# Altium PCB PCB2.PcbDoc
Units mil, origin at the board's own origin, x right, y up, seen from the top; angles counter-clockwise.
Board outline 5473 x 2834 mil, 2 copper layers (Top Layer, Bottom Layer); 32 components, 38 nets, 185 pads, 40 vias.
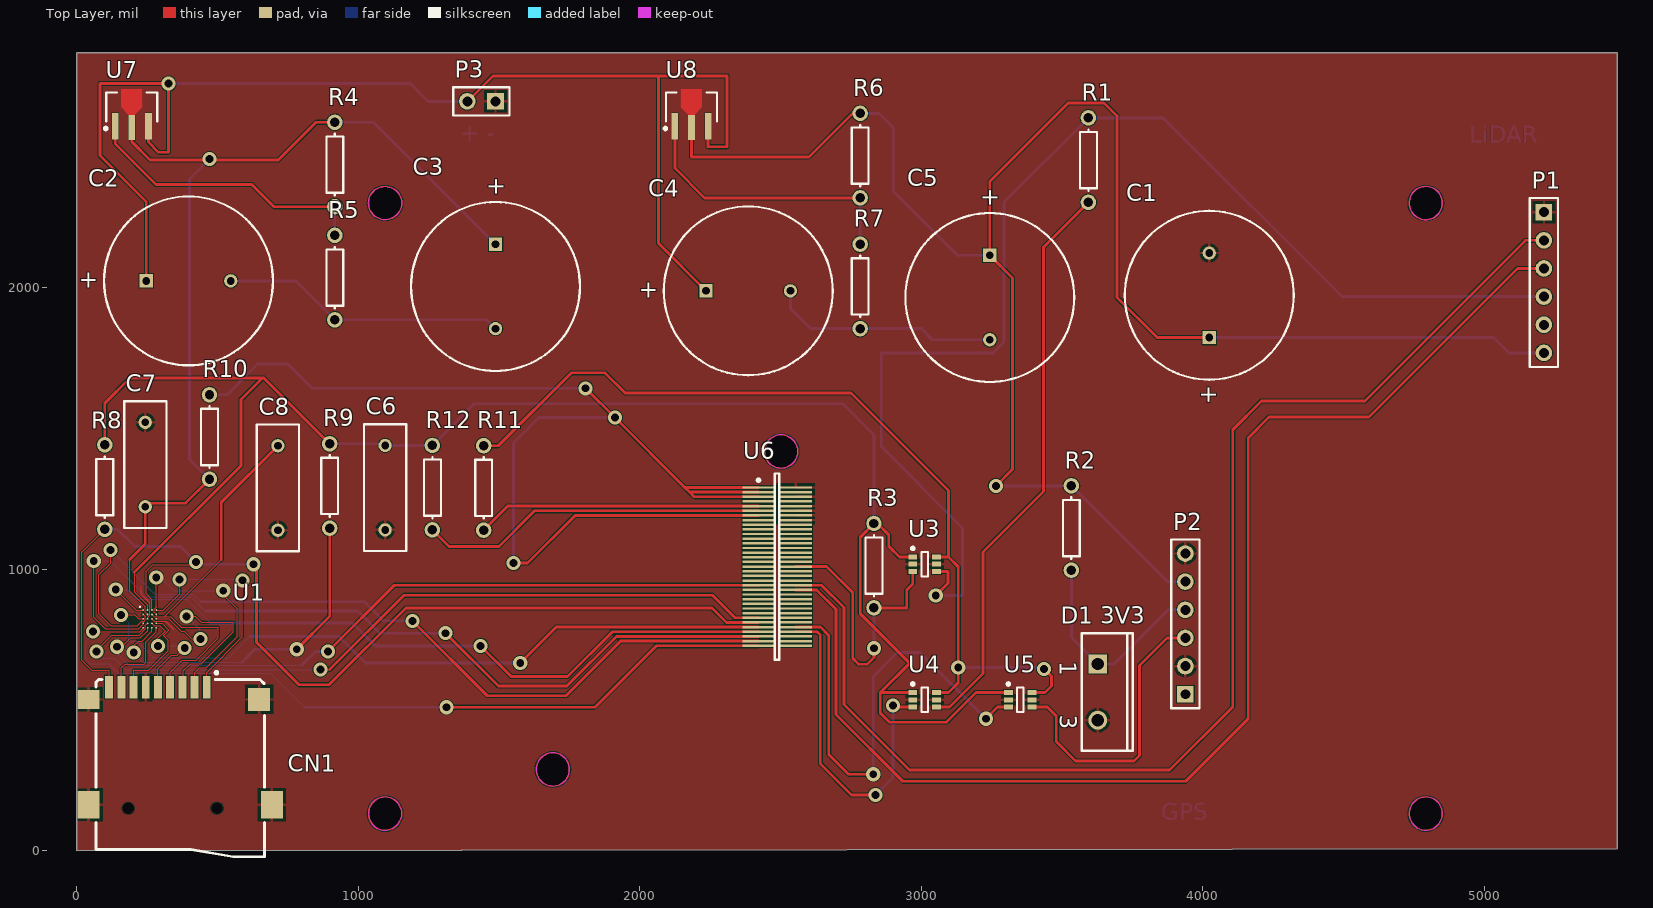
[diagram p0: Top Layer view]
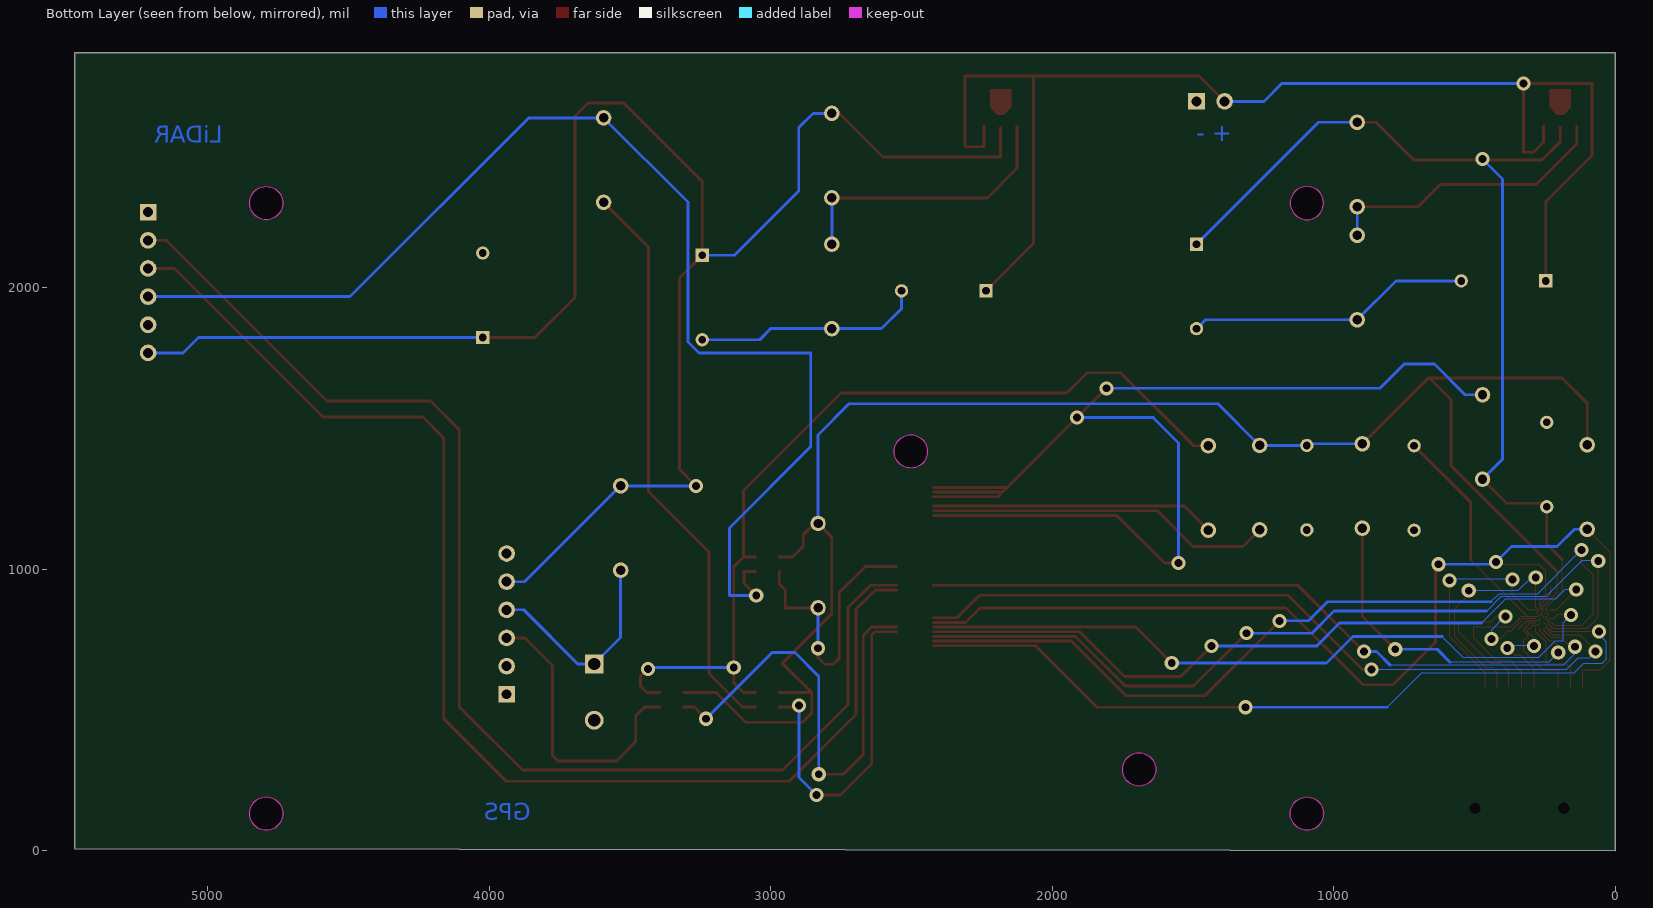
[diagram p1: Bottom Layer view, seen from below]

## Layer stack, top to bottom
Top Solder: solder mask 0.4, Solder Resist, Dk 3.5
Top Layer: signal copper 1.4
Dielectric 1: dielectric 12.6, FR-4, Dk 4.8
Bottom Layer: signal copper 1.4
Bottom Solder: solder mask 0.4, Solder Resist, Dk 3.5

## Board outline
0,0 0,2820 0,2834 14,2834 5473,2834 5473,7 5473,6
cut-out: 1632.82,288.16 ccw(c1691.87,288.16) 1691.87,229.1 ccw(c1691.87,288.16) 1750.93,288.16 ccw(c1691.87,288.16) 1691.87,347.21 ccw(c1691.87,288.16)
cut-out: 2443.84,1417.68 ccw(c2502.9,1417.68) 2502.9,1358.63 ccw(c2502.9,1417.68) 2561.95,1417.68 ccw(c2502.9,1417.68) 2502.9,1476.74 ccw(c2502.9,1417.68)
cut-out: 1095.87,2240.94 cw(c1095.87,2300) 1036.82,2300 cw(c1095.87,2300) 1095.87,2359.06 cw(c1095.87,2300) 1154.93,2300 cw(c1095.87,2300)
cut-out: 1036.82,131.16 ccw(c1095.87,131.16) 1095.87,72.1 ccw(c1095.87,131.16) 1154.93,131.16 ccw(c1095.87,131.16) 1095.87,190.21 ccw(c1095.87,131.16)
cut-out: 4733.82,131.16 ccw(c4792.87,131.16) 4792.87,72.1 ccw(c4792.87,131.16) 4851.93,131.16 ccw(c4792.87,131.16) 4792.87,190.21 ccw(c4792.87,131.16)
cut-out: 4733.82,2300 ccw(c4792.87,2300) 4792.87,2240.94 ccw(c4792.87,2300) 4851.93,2300 ccw(c4792.87,2300) 4792.87,2359.06 ccw(c4792.87,2300)

## Design rules (kind name [scope] priority, off if disabled: settings)
Clearance "Clearance_Pwr Reg" [InComponent('U7','U8')] p1: gap=0
Clearance Clearance_BGA [All] p2: gap=3
Clearance Clearance_5mil [All] p3: gap=5
Clearance [All] p4: gap=10
FanoutControl Fanout_BGA [IsBGA] p1: bgadir=Out bgaviamode=Centered fanoutstyle=BGA fanoutdirection=Alternating viagrid=1 // Fanout_BGA (Default Rule)
PolygonConnect [All] p1: connectstyle=Relief reliefconductorwidth=10 reliefentries=4 polygonreliefangle="90 Angle" airgapwidth=10
RoomDefinition BGA [InComponentClass('Room Definition 1')] p1: confinementstyle=ConfineIn formatcopy=TRUE lockcomponents=FALSE outline 207.52,762.64 207.52,883.03 312.17,883.03 312.17,762.64
RoutingVias RoutingVias_BGA [WithinRoom('BGA')] p1: holewidth=10 width=20 viastyle="Through Hole" minholewidth=10 minwidth=20 maxholewidth=10 maxwidth=20
RoutingVias [All] p2: holewidth=28 width=50 viastyle="Through Hole" minholewidth=28 minwidth=50 maxholewidth=28 maxwidth=50
SolderMaskExpansion [All] p1: expansion=4
Width Width_BGA [WithinRoom('BGA')] p1: maxlimit=3 minlimit=3 preferedwidth=3
Width [All] p2: maxlimit=10 minlimit=3 preferedwidth=3
29 further rules are at their usual default settings.

## Classes and differential pairs
component class "Room Definition 1": U1
component class PCB_01: C1 C2 C3 C4 C5 C6 C8 CN1 "D1 3V3" P1 P2 P3 R1 R2 R3 R4 R5 R6 R7 R8 R9 R10 R11 R12 U1 U3 U4 U5

## Components (designator, comment, footprint, x,y, rotation, side; value= is the part's Value field where it differs from the comment)
C1 "Cap Pol1" RB7.6-15 4023.62,1972.44 r270 top
C2 "Cap Pol1" RB7.6-15 397.64,2023.62 r180 top
C3 "Cap Pol1" RB7.6-15 1488.19,2003.94 r90 top
C4 "Cap Pol1" RB7.6-15 2385.83,1988.19 r180 top
C5 "Cap Pol1" RB7.6-15 3244.09,1964.57 r90 top
C6 "Cap" RAD-0.3 1096,1289 r90 top
C7 "Cap" RAD-0.3 244,1371 r90 top (schematic designator C8)
C8 "Cap" RAD-0.3 715,1288 r90 top
CN1 "MicroSD Slot" "MICROSD Slot" 208.66,586.61 r90 top locked
"D1 3V3" "1N5257B" TO-220AC 3627.81,562.99 r270 top (schematic designator "D1     3.3V")
P1 "LiDAR" HDR1X6#1 5212.6,2267.72 r270 top
P2 "GPS" HDR1X6#2 3938.83,555.12 r90 top
P3 "8V Battery" HDR1X2 1488.19,2661.42 r180 top
R1 "Res1" AXIAL-0.3 3594.49,2452.76 r90 top
R2 "Res1" AXIAL-0.3 3533.8,1145.67 r270 top
R3 "Res1" AXIAL-0.3 2832.54,1011.81 r90 top
R4 "Res1" AXIAL-0.3 917.32,2437.01 r270 top
R5 "Res1" AXIAL-0.3 917.32,2035.43 r270 top
R6 "Res1" AXIAL-0.3 2783.46,2468.5 r270 top
R7 "Res1" AXIAL-0.3 2783.46,2003.94 r270 top
R8 "Res1" AXIAL-0.3 100,1291 r90 top
R9 "Res1" AXIAL-0.3 899,1295 r90 top
R10 "Res1" AXIAL-0.3 472,1469 r90 top
R11 "Res1" AXIAL-0.3 1446,1288 r90 top
R12 "Res1" AXIAL-0.3 1264,1289 r90 top
U1 "SD Transceiver" "TXS0206-29_Dia Reduce" 259.84,822.83 r0 top
U3 "Level Shifter" 74LVC1T45 3012.77,1017.2 r0 top
U4 "Level Shifter" 74LVC1T45 3012.77,535.43 r0 top
U5 "Level Shifter" 74LVC1T45 3352.22,535.43 r0 top
U6 "DF40(3)_70Pin" DF40(3)_70Pin 2488.33,1008.63 r0 top locked
U7 "Power Regulator" LM317LCPK 196.06,2614.17 r90 top
U8 "Power Regulator" LM317LCPK 2184.25,2614.17 r90 top

## Footprints (in the part's own frame and the unit in brackets; to place one, negate y for a bottom-side part, rotate by r counter-clockwise, add the part's x,y. Pads: shape width x height; smd on the part's side, far side on the other; paste and mask are expansions set on the pad)
74LVC1T45 [mm] "SOT65P210X110-6N, SOT23, 6-Leads, Body 2.00x2.10mm, Pitch 0.65mm, IPC Medium Density"
  rect 0.8x0.45 smd: 1(-1.075,0.65) 2(-1.075,0) 3(-1.075,-0.65) 4(1.075,-0.65) 5(1.075,0) 6(1.075,0.65)
  silkscreen extent -1.2,-1.1 0.3,1.55, body extent -0.67,-1.1 0.67,1.1, height 1.1
AXIAL-0.3 [mm] "Axial Device, Thru-Hole; 2 Leads; 0.3 in Pin Spacing"
  round 1.4 hole 0.85: 1(-3.81,0) 2(3.81,0)
  silkscreen extent -2.77,-0.76 2.77,0.76
DF40(3)_70Pin [mm] "SOJ42P450X305-70M,SOJ, 70-Leads, Body 16.80x4.53mm, Pitch 0.42mm, IPC Low Density"
  rect 2.91x0.22 smd: 1(1.675,7.14) 2(-1.675,7.14) 3(1.675,6.72) 4(-1.675,6.72) 5(1.675,6.3) 6(-1.675,6.3) 7(1.675,5.88) 8(-1.675,5.88) 9(1.675,5.46) 10(-1.675,5.46) 11(1.675,5.04) 12(-1.675,5.04) 13(1.675,4.62) 14(-1.675,4.62) 15(1.675,4.2) 16(-1.675,4.2) 17(1.675,3.78) 18(-1.675,3.78) 19(1.675,3.36) 20(-1.675,3.36) 21(1.675,2.94) 22(-1.675,2.94) 23(1.675,2.52) 24(-1.675,2.52) 25(1.675,2.1) 26(-1.675,2.1) 27(1.675,1.68) 28(-1.675,1.68) 29(1.675,1.26) 30(-1.675,1.26) 31(1.675,0.84) 32(-1.675,0.84) 33(1.675,0.42) 34(-1.675,0.42) 35(1.675,0) 36(-1.675,0) 37(1.675,-0.42) 38(-1.675,-0.42) 39(1.675,-0.84) 40(-1.675,-0.84) 41(1.675,-1.26) 42(-1.675,-1.26) 43(1.675,-1.68) 44(-1.675,-1.68) 45(1.675,-2.1) 46(-1.675,-2.1) 47(1.675,-2.52) 48(-1.675,-2.52) 49(1.675,-2.94) 50(-1.675,-2.94) 51(1.675,-3.36) 52(-1.675,-3.36) 53(1.675,-3.78) 54(-1.675,-3.78) 55(1.675,-4.2) 56(-1.675,-4.2) 57(1.675,-4.62) 58(-1.675,-4.62) 59(1.675,-5.04) 60(-1.675,-5.04) 61(1.675,-5.46) 62(-1.675,-5.46) 63(1.675,-5.88) 64(-1.675,-5.88) 65(1.675,-6.3) 66(-1.675,-6.3) 67(1.675,-6.72) 68(-1.675,-6.72) 69(1.675,-7.14) 70(-1.675,-7.14)
  silkscreen extent -1.8,-8.4 0.2,8.4, body extent -1.19,-8.4 1.19,8.4, height 3.05
HDR1X2 [mm] "Connector; Header; 2 Position"
  rect 1.5x1.5 hole 0.9: 1(0,0)
  round 1.5 hole 0.9: 2(2.54,0)
  silkscreen extent -1.27,-1.27 3.81,1.27
HDR1X6#1 [mm] "Connector; Header; 6 Position"
  rect 1.5x1.5 hole 0.9: 1(0,0)
  round 1.5 hole 0.9: 2(2.54,0) 3(5.08,0) 4(7.62,0) 5(10.16,0) 6(12.7,0)
  silkscreen extent -1.27,-1.27 13.97,1.27
HDR1X6#2 [mm] "Connector; Header; 6 Position"
  rect 1.5x1.5 hole 0.9: 1(0,0)
  round 1.5 hole 0.9 paste+0: 2(2.54,0)
  round 1.5 hole 0.9: 3(5.08,0) 4(7.62,0) 5(10.16,0) 6(12.7,0)
  silkscreen extent -1.27,-1.27 13.97,1.27
LM317LCPK [mm] "SOT89-150P350X160-3N, SOT89, 3-Leads, Body 4.50x2.50mm, Pitch 1.50mm, Lead Span 3.5mm, IPC Medium Density"
  rect 2.4x0.6 smd: 1(-1.05,1.5) 3(-1.05,-1.5)
  rect 2.25x0.6 smd: 2(-1.15,0)
  Top Layer region: 0,0.3 0.65,0.95 1.6,0.95 2.159,0.95 2.286,0.95 2.286,0.762 2.286,0.508 2.286,0.067 2.286,-0.264 2.286,-0.95 1.6,-0.95 0.65,-0.95 0,-0.3 0,-0.025
  silkscreen extent -1.37,-2.3 2,2.47, body extent -0.6,-2.3 2,2.3, height 1.6
"MICROSD Slot" [mil] "MicroSD Card Socket"
  rect 80x28 smd: 1(-6,-253.47) 2(-6,-210.16) 3(-6,-166.85) 4(-6,-123.55) 5(-6,-80.24) 6(-6,-36.93) 7(-6,6.38) 8(-6,49.68) 9(-6,92.99)
  rect 98.43x78.74 smd: 10(-424.01,-485) 13(-424.01,166)
  rect 83x78.74 smd: 11(-50,-439.8)
  rect 67x78.74 smd: 12(-50,166)
  round 23.62 hole 40 unplated: MH1(-436.89,25) MH2(-436,-289.96)
  silkscreen extent -609,-459 50,140, body extent -611,-460 21,140, height 67
RAD-0.3 [mm] "Radial Cap, Thru-Hole; 2 Leads; 0.3 in Pin Spacing"
  round 1.2 hole 0.7: 1(-3.81,0) 2(3.81,0)
  silkscreen extent -5.71,-1.91 5.71,1.91
RB7.6-15 [mm] "Polarized Capacitor (Radial); 2 Leads"
  rect 1.2x1.2 hole 0.7: 1(3.81,0)
  round 1.2 hole 0.7: 2(-3.81,0)
  silkscreen extent -7.62,-7.62 7.62,7.62
TO-220AC [mm] "TO, Thru-Hole, Vertical, Heatsink Mounted; 3 In-Line Leads (1 Absent); Pitch 2.54 mm"
  rect 1.7x1.7 hole 1.1: 1(-2.54,0)
  round 1.7 hole 1.1: 3(2.54,0)
  silkscreen extent -5.3,-1.45 5.3,3.15
"TXS0206-29_Dia Reduce" [mm] "BGA20C40P4X5_156X196X50, BGA, 20-Leads, Body 1.56x1.96mmx0.50mm, Pitch 0.40mm"
  round 0.15 smd: A1(-0.6,0.8) A2(-0.2,0.8) A3(0.2,0.8) A4(0.6,0.8) B1(-0.6,0.4) B2(-0.2,0.4) B3(0.2,0.4) B4(0.6,0.4) C1(-0.6,0) C2(-0.2,0) C3(0.2,0) C4(0.6,0) D1(-0.6,-0.4) D2(-0.2,-0.4) D3(0.2,-0.4) D4(0.6,-0.4) E1(-0.6,-0.8) E2(-0.2,-0.8) E3(0.2,-0.8) E4(0.6,-0.8)
  silkscreen extent -0.93,1.04 -0.83,1.13, body extent -0.78,-0.98 0.78,0.98, height 0.5

## Part data
C1 C2 C3 C4 C5: "Polarized Capacitor (Radial)"
C6 C7 C8: "Capacitor"
"D1 3V3": library part "Diode 10TQ040", "Schottky Rectifier"
P1: library part "Header 6", "Header, 6-Pin, for LiDAR"
P2: library part "Header 6", "Header, 6-Pin, for GPS"
P3: library part "Header 2H", "Header, 2-Pin, Right Angle"
R1 R2 R3 R4 R5 R6 R7 R8 R9 R10 R11 R12: "Resistor"
U1: library part TXS0206-29
U3 U4 U5: library part Component_1, "74LVC1T45 Level Shifter"

## Via types
v1: diameter 50, hole 28, Top Layer to Bottom Layer, 40 vias

## Nets (pads, with @x,y where several pads share a name; then routed paths per layer and width w, separated by ;. In a path a pad name is that pad's centre, name@x,y a point inside that pad or via, vN(x,y) a via of type N, cw(c..) or ccw(c..) an arc to the next point about the centre after c; other vN are vias at no path point)
GND: "D1 3V3.3" C1.2 C6.1 C7.2 C8.1 CN1.6 CN1.10 CN1.11 CN1.12 CN1.13 P1.1 P2.2 P2.6 P3.1 U1.C2 U1.C3 U3.2 U3.5 U4.2 U4.5 U5.2 U5.5 U6.1 U6.5 U6.9 U6.11 U6.13 U6.15 | length 224.6
  Top Layer w3: 229,939 229,910 259.42,879.58 259.42,835.49 251.97,828.04 U1.C2 U1.C2@252.13,823 ; U1.C3 275.55,815 316,815 345,786
NetC1_1: C1.1 C5.1 P1.6 P2.5 R2.1 R6.1 U8.2 | length 6353
  Top Layer w10: U8.2 2184.25,2464.17 2601.97,2464.17 2756.3,2618.5 R6.1 ; v1(3265.61,1295.28) 3325,1354.67 3325,2033.66 C5.1 3244.1,2377.1 3523,2656 3650,2656 3696,2610 3696,1965 3839,1822 C1.1@4023.18,1822
  Bottom Layer w10: R6.1 2850.5,2618.5 2901,2568 2901,2343 3129.43,2114.57 C5.1 ; v1(3265.61,1295.28) 3533.4,1295.28 R2.1 3874.35,955.12 P2.5 ; C1.1 5033.56,1822.44 5088.28,1767.72 P1.6
NetC2_1: C2.1 C4.1 P3.2 U7.3 U8.3 | length 4674.4
  Top Layer w10: C2.1 247.64,2304.36 82.68,2469.32 82.68,2724.41 v1(326.77,2724.41) 326.77,2480.32 291.34,2480.32 255.12,2516.54 U7.3 ; P3.2 1478.74,2751.97 2066.93,2751.97 ; C4.1 2066.93,2157.09 2066.93,2751.97 ; U8.3 2243.31,2500 2311.02,2500 2311.02,2751.97 2066.93,2751.97
  Bottom Layer w10: v1(326.77,2724.41) 1185.04,2724.41 1248.03,2661.42 P3.2
NetC2_2: C2.2 C3.2 R5.2 | length 1010.8
  Bottom Layer w10: C2.2 779.13,2023.62 R5.2 1456.69,1885.43 C3.2
NetC3_1: C3.1 C7.1 R4.1 R10.1 U1.B2 U7.2 | length 3500.8
  Top Layer w3: 189,1034 189,921.74 244,866.74 244,846.55 U1.B2
  Top Layer w10: 189,1034 244,1089 C7.1 257,1234 387,1234 R10.1 ; U7.2 196.06,2517.94 261.24,2452.76 716.54,2452.76 850.79,2587.01 R4.1
  Bottom Layer w10: R10.1 401,1390 401,2385 v1(472,2456) ; R4.1 1055.12,2587.01 C3.1
NetC4_2: C4.2 C5.2 R7.2 | length 817.3
  Bottom Layer w10: C4.2 2535.83,1924.8 2606.69,1853.94 R7.2 3000.39,1853.94 3039.76,1814.57 C5.2
NetC6_2: C6.2 R3.2 R8.2 R9.2 R12.2 U1.A2 U3.1 U4.1 U5.1 | length 6119.6
  Top Layer w3: 206,989 206,916.82 251.97,870.85 U1.A2
  Top Layer w10: R8.2 100,1589 190,1679 665,1679 R9.2 ; 206,989 584,1367 584,1602 661,1679 ; U4.1 2854.98,561.02 ; U3.1 2923.2,1042.8 2885,1081 2885,1122 2845.19,1161.81 R3.2 2783.72,1113 2783.72,841.28 2959.48,665.52 2854.98,561.02 ; U5.1 3195.02,561.02 3090,456 2887,456 2854.98,488.02 2854.98,561.02
  Bottom Layer w10: R9.2 1090,1445 C6.2 R12.2 1412,1587 2722,1587 2832.54,1476.46 R3.2
NetC8_2: C8.2 CN1.4 U1.B3 | length 1341.9
  Top Layer w3: U1.B3 275.3,831 334,831 372,793 504,793 504,755 425,676 375,676 332.21,633.21 CN1.4 ; 312,831 514,1033
  Top Layer w10: 514,1033 514,1237 C8.2
NetCN1_1: CN1.1 U1.A4 | length 813.4
  Top Layer w3: U1.A4 308.03,854.33 366,912.3 v1(366,963) ; CN1.1 462.13,632.13 589,759 v1(589,960)
  Bottom Layer w3: v1(366,963) 586,963 v1(589,960)
NetCN1_2: CN1.2 U1.B4 | length 835.3
  Top Layer w3: v1(283,970) 283,866.41 284,865.41 276.01,857.42 276.01,846.06 U1.B4 ; CN1.2 418.82,631.82 437,650 460,650 570,760 570,859 521,908 v1(521,923)
  Bottom Layer w3: v1(283,970) 298,970 346,922 520,922 v1(521,923)
NetCN1_3: CN1.3 U1.C4 | length 784.9
  Top Layer w3: U1.C4 327.17,822.83 371,779 382,779 409,752 v1(440,752) ; CN1.3@379,584.1 379,638 405,664 443,664 557,778 557,811 443,811 422,832 v1(391,832)
  Bottom Layer w3: v1(391,832) 393,832 440,785 v1(440,752)
NetCN1_5: CN1.5 U1.D3 | length 411
  Top Layer w3: U1.D3 276.01,798.79 295.79,798.79 315,779.58 289,753.58 v1(289,727) ; CN1.5 288.9,645.9 336,693 357,693 v1(384,720)
  Bottom Layer w3: v1(289,727) 377,727 v1(384,720)
NetCN1_7: CN1.7 U1.D4 | length 353.3
  Top Layer w3: CN1.7 202.28,640.72 202,641 256,641 325,710 325,747.64 310,762.64 310,765 328,783 303.91,807.09 U1.D4
NetCN1_8: CN1.8 U1.E4 | length 302.1
  Top Layer w3: CN1.8 158.98,648.98 172,662 240,662 246,668 246,739 283.46,776.46 U1.E4
NetCN1_9: CN1.9 R8.1 U1.A3 U6.60 | length 3866.1
  Top Layer w3: R8.1 18.5,1059.5 18.5,675.5 53,641 115.67,641 CN1.9 ; U1.A3 267.72,891.28 247,912 247,992 270,1015 422,1015 424,1013 v1(424,1025) v1@432,1025
  Top Layer w10: v1(628,1017) 639,1006 639,740 790,589 897,589 1170,862 2257,862 2308.79,810.21 U6.60
  Bottom Layer w10: R8.1 146,1141 207,1080 369,1080 v1(424,1025) 432,1017 v1(628,1017)
"NetD1     3.3V_1": "D1 3V3.1" P2.4 R2.2 | length 762.2
  Bottom Layer w10: R2.2 3533.79,757.01 3627.81,662.99 3685.99,662.99 3878.12,855.12 P2.4
NetP1_2: P1.2 U6.43 | length 4488.2
  Top Layer w10: U6.43 2646.51,942.49 2726,863 2726,519 2959,286 3883,286 4107,510 4107,1495 4209,1597 4576.57,1597 5147.28,2167.72 P1.2
NetP1_3: P1.3 U6.45 | length 4498.2
  Top Layer w10: U6.45 2629.05,925.95 2698,857 2698,483 2935,246 3940,246 4162,468 4162,1466 4236,1540 4591,1540 5118.72,2067.72 P1.3
NetP1_4: P1.4 R1.2 U3.4 | length 4475.4
  Top Layer w10: v1(3051.98,905.51) 3095.8,949.33 3095.8,991.61 U3.4
  Bottom Layer w10: 2858.27,1432.98 2858.27,1767 3255.19,1767 3295,1806.81 3295,2303.27 R1.2 3860.24,2602.76 4495.28,1967.72 P1.4 ; 2860,1432.98 3147.5,1145.48 3147.5,905.51 v1(3051.98,905.51)
NetP2_3: P2.3 U5.4 | length 1045
  Top Layer w10: U5.4 3448.16,509.84 3480,478 3480,387 3549,318 3756,318 3776,338 3776,657 3874.12,755.12 P2.3
NetR1_1: R1.1 U4.4 | length 2043.1
  Top Layer w10: U4.4 3100.84,509.84 3220,629 3220,1061 3434.9,1275.9 3434.9,2143.17 R1.1
NetR3_1: R3.1 U3.3 U6.35 | length 1000.2
  Top Layer w10: U6.35 2664.37,1008.63 2757,916 2757,683 2778,662 2809,662 2832.54,685.54 v1(2832.54,718.46) ; R3.1 2949.04,861.81 2949.04,926.04 2970.45,947.45 U3.3
  Bottom Layer w10: R3.1 v1(2832.54,718.46) v1@2833,718
NetR4_2: R4.2 R5.1 U7.1 | length 1036.4
  Top Layer w10: U7.1 137.01,2511.17 282.03,2366.14 622.05,2366.14 701.18,2287.01 R4.2
  Bottom Layer w10: R5.1 R4.2
NetR6_2: R6.2 R7.1 U8.1 | length 1015.4
  Top Layer w10: U8.1 2125.2,2424 2230.69,2318.5 R6.2
  Bottom Layer w10: R7.1 R6.2
NetR9_1: R9.1 U1.E3 | length 1216.2
  Top Layer w3: v1(203,703) 203,727 220,744 233,744 267.72,778.72 U1.E3 ; R9.1 R9.1@901,1143
  Top Layer w10: v1(782,715) 899,832 R9.1
  Bottom Layer w3: v1(203,703) 237,669 587,669
  Bottom Layer w10: 587,669 633,715 v1(782,715)
NetR10_2: R10.2 U6.2 U6.4 U6.6 U6.14 | length 4463.4
  Top Layer w10: v1(1552,1021) 1602,1021 1771.52,1190.52 U6.14 ; v1(1808,1642) v1(1912,1538) 2160.27,1289.73 ; U6.6 2193.34,1256.66 2176.8,1273.2 ; U6.4 2176.8,1273.2 ; U6.2 2160.27,1289.73 ; 2160.27,1289.73 2176.8,1273.2
  Bottom Layer w10: R10.2 534,1619 643,1728 750,1728 836,1642 v1(1808,1642) ; v1(1552,1021) 1552,1448 1642,1538 v1(1912,1538)
NetR11_1: R11.1 U6.10 | length 1011.8
  Top Layer w10: R11.1 1531.59,1223.59 U6.10
NetR12_1: R12.1 U6.12 | length 1235.5
  Top Layer w10: R12.1 1323,1080 1500,1080 1627.06,1207.06 U6.12
NetU1_A1: U1.A1 U6.64 | length 2608.5
  Top Layer w3: v1@142.89,927 v1(139,927) 211.67,854.33 U1.A1
  Top Layer w10: v1(1435,727) 1544,618 1744,618 1903.13,777.13 U6.64
  Bottom Layer w3: v1(139,927) 180,927 214,893 391,893 476,808
  Bottom Layer w10: 476,808 980,808 1061,727 v1(1435,727)
NetU1_B1: U1.B1 U6.68 | length 3053.6
  Top Layer w3: v1(121,1068) 121,1021 79,979 79,842 122,799 216,799 232,815 240,815 244,819 244,830.8 U1.B1
  Top Layer w10: v1(1193,816) 1459,550 1739,550 1933.06,744.06 U6.68
  Bottom Layer w3: v1(121,1068) 278,911 415,911 442,884
  Bottom Layer w10: 442,884 1023,884 1091,816 v1(1193,816)
NetU1_C1: U1.C1 U6.62 | length 2575
  Top Layer w3: v1(158,837) 206,837 220.17,822.83 U1.C1
  Top Layer w10: v1(1576,666) 1703.67,793.67 U6.62
  Bottom Layer w3: v1@160,837 v1(158,837) 186,809 186,743 216,743 274,685 540,685 615,760
  Bottom Layer w10: 615,760 932,760 1026,666 v1(1576,666)
NetU1_D1: U1.D1 U6.66 | length 3021.4
  Top Layer w3: v1(61,1029) 61,828 101,788 220.2,788 236.22,804.02 U1.D1
  Top Layer w10: v1(1311,772) 1499,584 1741,584 1917.6,760.6 U6.66
  Bottom Layer w3: v1(61,1029) 120,1029 248,901 407,901 457.5,850.5
  Bottom Layer w10: 457.5,850.5 999.5,850.5 1078,772 v1(1311,772)
NetU1_D2: U1.D2 U6.58 | length 2753.3
  Top Layer w3: v1(71,707) 71,711.28 124.72,765 222,765 244.52,787.52 244.52,799.63 U1.D2 ; v1(866,643) 899,643
  Top Layer w10: 899,643 1163,907 2259,907 2310.78,855.22 2339.26,826.74 U6.58
  Bottom Layer w3: v1(71,707) 95,683 134,683 175,642 865,642 v1(866,643)
NetU1_E1: U1.E1 U6.70 | length 2844.3
  Top Layer w3: v1(58,778) 224.44,778 236.22,789.78 U1.E1
  Top Layer w10: v1(1314,509) 1841,509 2059.53,727.53 U6.70
  Bottom Layer w3: v1(58,778) 58,767 33,742 33,679 48,664 114,664 148,630 690,630 811,509
  Bottom Layer w10: 811,509 v1(1314,509)
NetU1_E2: U1.E2 U6.44 | length 2581.6
  Top Layer w3: v1(143,724) 161,724 192,755 226,755 251.97,780.97 U1.E2
  Top Layer w10: v1(893,707) 1128.49,942.49 U6.44
  Bottom Layer w3: v1(143,724) 143,700 185,658 800,658
  Bottom Layer w10: 800,658 849,707 v1(893,707)
NetU3_6: R11.2 U3.6 U4.6 U5.6 | length 3212.2
  Top Layer w10: R11.2 1498,1438 1757,1697 1877,1697 1949,1625 2751,1625 3097.2,1278.8 3097.2,1042.8 ; U4.6 3097.02,561.02 3132,596 v1(3132,650) 3132,1008 3097.2,1042.8 ; U3.6 3097.2,1042.8 ; U5.6 3440.02,561.02 3463,584 3463,619 v1(3437,645)
  Bottom Layer w10: v1(3132,650) v1@3432,650
NetU4_3: U4.3 U6.63 | length 1208
  Top Layer w10: U6.63 2629.87,777.13 2642,765 2642,308 2753,197 v1(2838,197) ; v1(2900,515) 2905.16,509.84 U4.3
  Bottom Layer w10: v1(2838,197) 2900,259 v1(2900,515)
NetU5_3: U5.3 U6.61 | length 1731
  Top Layer w10: U6.61 2642.33,793.67 2672,764 2672,341 2742,271 v1(2830,271) ; v1(3230,468) 3271.84,509.84 U5.3 U5.3@3310,509.84
  Bottom Layer w10: v1(2830,271) 2830,618 2833,621 ; 2843,631 2833,621 ; v1(3230,468) 2995,703 2915,703 2833,621
pads on no net: CN1.MH1 CN1.MH2 P1.5 P2.1 U6.3 U6.7 U6.8 U6.16 U6.17 U6.18 U6.19 U6.20 U6.21 U6.22 U6.23 U6.24 U6.25 U6.26 U6.27 U6.28 U6.29 U6.30 U6.31 U6.32 U6.33 U6.34 U6.36 U6.37 U6.38 U6.39 U6.40 U6.41 U6.42 U6.46 U6.47 U6.48 U6.49 U6.50 U6.51 U6.52 U6.53 U6.54 U6.55 U6.56 U6.57 U6.59 U6.65 U6.67 U6.69
copper on no net: | length 2226.3
  Top Layer w5: 1154.93,131.16 ccw(c1095.87,131.16) 1154.93,131.16 ; 1154.93,2300 ccw(c1095.87,2300) 1154.93,2300 ; 1750.93,288.16 ccw(c1691.87,288.16) 1750.93,288.16 ; 2561.95,1417.68 ccw(c2502.9,1417.68) 2561.95,1417.68 ; 4851.93,131.16 ccw(c4792.87,131.16) 4851.93,131.16 ; 4851.93,2300 ccw(c4792.87,2300) 4851.93,2300

## Polygon pours and split planes (outlines as drawn)
GND on Top Layer "Top Layer-GND" (solid, pour order 2): 0,0 0,2834 5472,2834 5473,2835 5473,6

## Other copper
Bottom Layer:
  text "+ -" at 1362,2520 h60
  text "LiDAR" at 4948,2514 h60
  text "GPS" at 3853,107 h60

## Silkscreen, mask and mechanical layers (free items; w line width, h text height)
Mechanical 1:
  rectangle: 1634,98 2618.25,1495.64
  rectangle: 4208.66,263.78 5389.76,1444.88
  rectangle: 70.87,11.81 503.94,602.36

## Text inside footprints (layer, text, board x,y; h text height)
C1: Top Overlay "+" at 3994.61,1652.29 h59.06 r270
C2: Top Overlay "+" at 77.48,2052.63 h59.06 r180
C3: Top Overlay "+" at 1517.2,2324.09 h59.06 r90
C4: Top Overlay "+" at 2065.67,2017.2 h59.06 r180
C5: Top Overlay "+" at 3273.1,2284.72 h59.06 r90
CN1: Mechanical 1 "PCB Edge" at 583.66,10.61 h9.84
"D1 3V3": Top Overlay "1" at 3492.97,672.83 h59.06 r270; Top Overlay "3" at 3492.97,482.68 h59.06 r270